# Altium PCB MB1293C.PcbDoc
Units mm, origin at the board's own origin, x right, y up, seen from the top; angles counter-clockwise.
Board outline 50.63 x 26.23 mm, 2 copper layers (Top Layer, Bottom Layer), stack 1.571 mm thick; 73 components, 55 nets, 560 pads, 45 vias.
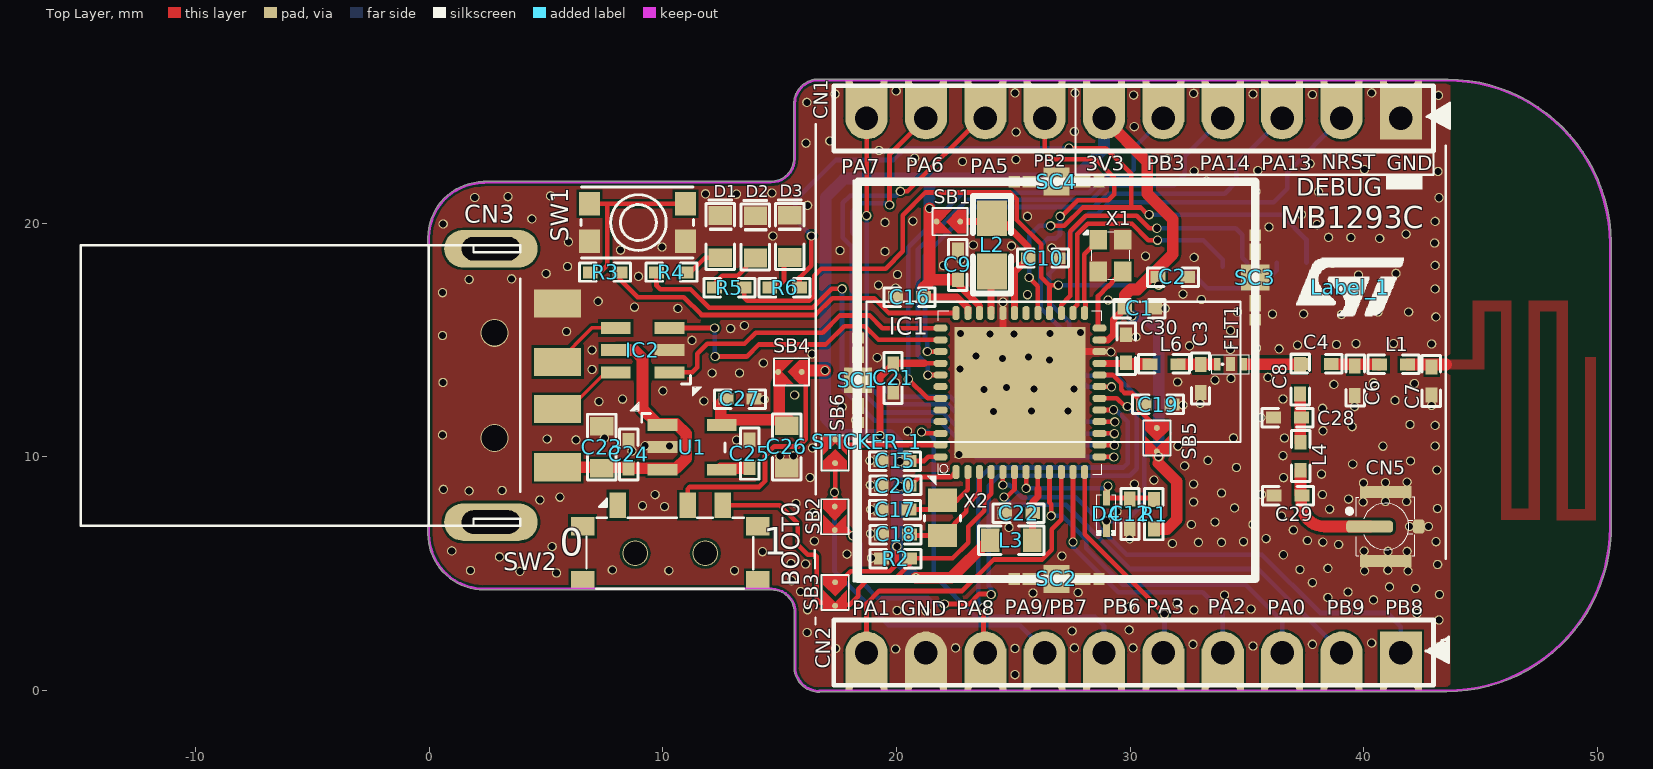
[diagram p0: Top Layer view]
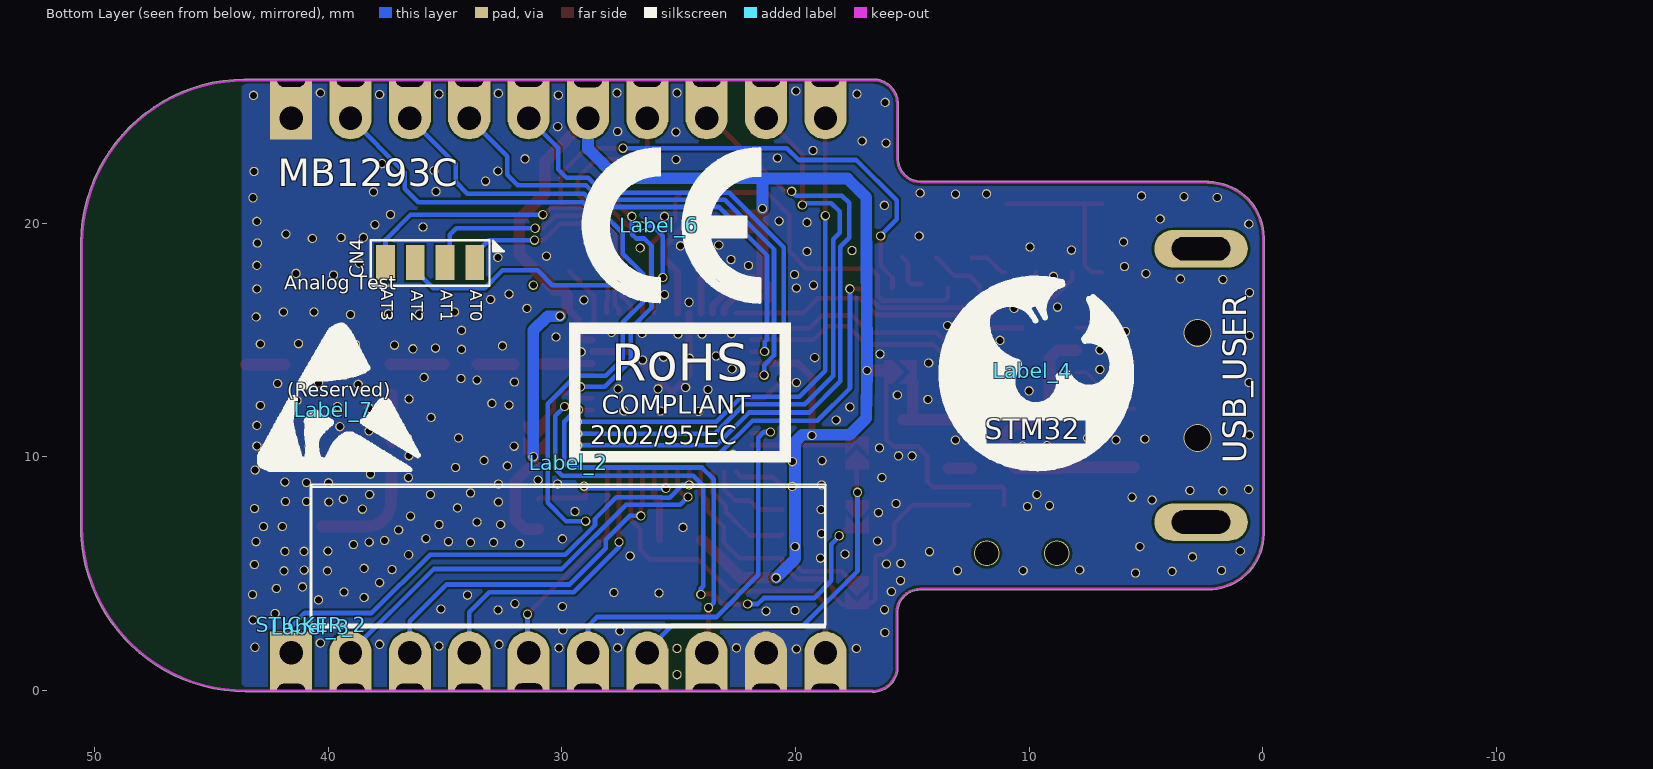
[diagram p1: Bottom Layer view, seen from below]

## Layer stack, top to bottom
Top Solder: solder mask 0.0102, Solder Resist, Dk 4.2
Top Layer: signal copper 0.0356
Dielectric1: prepreg 1.5, FR-4, Dk 4.4
Bottom Layer: signal copper 0.0356
Bottom Solder: solder mask 0.0102, Solder Resist, Dk 4.2

## Board outline
-0.051,6.716 cw(c-0.001,6.716) -0.051,6.724 -0.051,19.377 cw(c2.356,19.377) 2.326,21.783 cw(c2.356,21.743) 2.356,21.793 3.843,21.793 cw(c3.87,21.751) 3.87,21.801 14.63,21.801 cw(c14.63,21.751) 14.632,21.801 ccw(c14.63,22.771) 15.599,22.768 ccw(c14.63,22.771) 15.599,22.769 15.599,22.768 cw(c15.65,22.771) 15.599,22.773 15.599,25.101 cw(c16.67,25.101) 16.66,26.171 cw(c16.67,26.122) 16.67,26.172 43.568,26.172 cw(c43.568,26.122) 43.586,26.169 cw(c43.528,19.118) 50.578,19.194 cw(c50.53,19.178) 50.58,19.178 50.58,6.711 cw(c50.53,6.711) 50.573,6.685 cw(c43.53,7.001) 43.548,-0.05 cw(c43.54,0) 43.54,-0.05 16.72,-0.05 cw(c16.69,-0.01) 16.69,-0.06 cw(c16.69,1.01) 15.619,1.01 cw(c15.67,1.01) 15.625,1.033 15.625,3.341 cw(c15.675,3.341) 15.629,3.362 ccw(c14.66,3.341) 14.66,4.31 cw(c14.66,4.361) 14.63,4.32 2.385,4.32 cw(c2.355,4.361) 2.355,4.31 cw(c2.355,6.716)

## Design rules (kind name [scope] priority, off if disabled: settings)
AssemblyTestPointUsage [All] p1 off:
AssemblyTestpoint [All] p1 off: testpointundercomponent=TRUE minsize=1.016 maxsize=2.54 preferedsize=1.524 minholesize=0 maxholesize=1.016 preferedholesize=0.813 testpointgrid=0.025 usegrid=TRUE gridtolerance=0 allowsidetop=TRUE allowsidebottom=TRUE
Clearance Clearance_PolyTop [InPolygon vs OnLayer('Top Layer')] p1: gap=0.115 ignorepadtopadclearanceinfootprint=FALSE except(0: Arc-Hole Track-Hole SMDPad-Hole THPad-Hole Via-Hole Fill-Hole Poly-Hole Region-Hole Text-Hole)
Clearance Clearance_1 [All] p2: gap=0.1 ignorepadtopadclearanceinfootprint=FALSE except(0: Arc-Hole Track-Hole SMDPad-Hole THPad-Hole Via-Hole Fill-Hole Poly-Hole Region-Hole Text-Hole)
ComponentClearance [All] p1 off: gap=0 collisioncheckmode=3 verticalgap=0.254 showdistances=FALSE
DiffPairsRouting [All] p1: maxlimit=0.254 minlimit=0.254 mostfreqgap=0.254 toplayer_minwidth=0.1 toplayer_maxwidth=0.381 toplayer_prefwidth=0.381 bottomlayer_minwidth=0.1 bottomlayer_maxwidth=0.381 bottomlayer_prefwidth=0.381 maxuncoupledlength=12.7
FabricationTestPointUsage TestPointUsage [All] p1 off: valid=0 allowmultiple=FALSE
FabricationTestpoint Testpoint [All] p1 off: side=3 testpointundercomponent=TRUE minsize=1.016 maxsize=2.54 preferedsize=1.524 minholesize=0.508 maxholesize=1.016 preferedholesize=0.813 testpointgrid=0.025 allowsidetop=TRUE allowsidebottom=TRUE usegrid=TRUE gridtolerance=0
FanoutControl Fanout_BGA [IsBGA] p1 off: bgadir=Out bgaviamode=Centered fanoutstyle=Auto fanoutdirection=Alternating viagrid=0.025 // Fanout_BGA (Default Rule)
FanoutControl Fanout_LCC [IsLCC] p2 off: bgadir=Out bgaviamode=Centered fanoutstyle=Auto fanoutdirection=Alternating viagrid=0.025 // Fanout_LCC (Default Rule)
FanoutControl Fanout_SOIC [IsSOIC] p3 off: bgadir=Out bgaviamode=Centered fanoutstyle=Auto fanoutdirection=Alternating viagrid=0.025 // Fanout_SOIC (Default Rule)
FanoutControl Fanout_Small [(CompPinCount < 5)] p4 off: bgadir=Out bgaviamode=Centered fanoutstyle=Auto fanoutdirection=OutThenIn viagrid=0.025 // Fanout_Small (Default Rule)
FanoutControl Fanout_Default [All] p5 off: bgadir=Out bgaviamode=Centered fanoutstyle=Auto fanoutdirection=Alternating viagrid=0.025 // Fanout_Default (Default Rule)
HoleSize [All] p1: absolutevalues=TRUE maxlimit=3.5 minlimit=0.2 maxpercent=80.000 minpercent=20.000
HoleToHoleClearance [All] p1 off: gap=0.254 allowstackedmicrovias=TRUE
MinimumSolderMaskSliver [All] p1 off: minsoldermaskwidth=0.254
NetAntennae [All] p1 off: netantennaetolerance=0
PasteMaskExpansion [All] p1 off: expansion=0
PolygonConnect [All] p1: connectstyle=Direct reliefconductorwidth=0.254 reliefentries=4 polygonreliefangle="90 Angle" airgapwidth=0.254
RoutingTopology [All] p1 off: topology=Shortest
RoutingVias [All] p1: holewidth=0.4 width=0.6 viastyle="Through Hole" minholewidth=0.2 minwidth=0.3 maxholewidth=6 maxwidth=10
SilkToBoardRegionClearance [All] p1 off:
SilkToSilkClearance [All] p1 off: silktosilkclearance=0.254
SilkToSolderMaskClearance SilkscreenOverComponentPads [IsPad] p1 off: minsilkscreentomaskgap=0.254 clearancetoexposedcopper=TRUE
SolderMaskExpansion [All] p1 off: expansion=0.102
Width [All] p1: maxlimit=5 minlimit=0.1 preferedwidth=0.2 minimp=50.000000 maximp=50.000000 favimp=50.000000
10 further rules are at their usual default settings.

## Classes and differential pairs
component class Schematic: C1 C2 C3 C4 C6 C7 C8 C9 C10 C12 C15 C16 C17 C18 C19 C20 C21 C22 C23 C24 C25 C26 C27 C28 C29 C30 CN1 CN2 CN3 CN4 CN5 D1 D2 D3 D4 FLT1 IC1 IC2 L1 L2 L3 L4 L6 R1 R2 R3 R4 R5 R6 R39 R40 R41 SB1 SB2 SB3 SB4 SB5 SB6 SC1 SC2 SC3 SC4 SW1 SW2 U1 X1 X2
component class Project_Overview: Label_1 Label_2 Label_3 Label_4 Label_5 Label_6 Label_7 Label_9 STICKER_2
differential pair USB: +USB_P -USB_N

## Components (designator, comment, footprint, x,y, rotation, side; value= is the part's Value field where it differs from the comment)
C1 "100nF" 0402_CAP_NPOL#1 30.404,16.358 r180 top
C2 "100pF" 0402_CAP_NPOL#1 31.826,17.704 r180 top
C3 "0.3pF" 0402_CAP_NPOL#2 33.02,13.36 r90 top
C4 "10nF" 0402_CAP_NPOL#1 37.97,13.974 r0 top
C6 "NF" 0402_CAP_NPOL#1 39.61,13.264 r270 top
C7 "1.5pF" 0402_CAP_NPOL#2 42.9,13.254 r90 top
C8 "NF" 0402_CAP_NPOL#1 37.27,13.324 r270 top
C9 "4.7uF" 0402_CAP_NPOL#1 22.631,18.217 r90 top
C10 "4.7uF" 0402_CAP_NPOL#1 26.27,18.501 r0 top
C12 "100nF" 0402_CAP_NPOL#1 29.98,7.561 r270 top
C15 "100nF" 0402_CAP_NPOL#2 19.94,9.831 r180 top
C16 "100nF" 0402_CAP_NPOL#2 20.56,16.841 r180 top
C17 "10pF" 0402_CAP_NPOL#2 19.94,7.751 r180 top
C18 "10pF" 0402_CAP_NPOL#2 19.96,6.691 r180 top
C19 "100nF" 0402_CAP_NPOL#2 31.191,12.243 r0 top
C20 "100nF" 0402_CAP_NPOL#2 19.95,8.771 r0 top
C21 "100nF" 0402_CAP_NPOL#2 19.863,13.386 r90 top
C22 "100nF" 0402_CAP_NPOL#2 25.23,7.601 r180 top
C23 "1uF" 0603_CAP_NPOL 7.391,10.419 r270 top
C24 "100nF" 0402_CAP_NPOL#2 8.534,10.114 r270 top
C25 "10nF" 0402_CAP_NPOL#2 13.716,10.14 r270 top
C26 "1uF" 0603_CAP_NPOL 15.3,10.431 r90 top
C27 "100nF" 0402_CAP_NPOL#2 13.3,12.491 r180 top
C28 "NF" 0402_CAP_NPOL#2 36.728,11.684 r180 top
C29 "NF" 0402_CAP_NPOL#2 36.754,8.357 r180 top
C30 "0.8pF" 0402_CAP_NPOL#2 29.82,14.63 r270 top
CN1 "HEADER_1X10" "Header M/F 1x10x2.54 NF" 41.58,24.491 r180 top
CN2 "HEADER_1X10" "Header M/F 1x10x2.54 NF" 41.58,1.631 r180 top
CN3 "USB_1" USB/A_M1 3.9,13.061 r90 top
CN4 "HEADER_1X4" SIL4_127_B 33.731,18.313 r270 bottom
CN5 "UFL" UFL 40.93,7.024 r90 top (schematic designator J2)
D1 "LED BLUE" 0603_LED_Blue 12.466,19.43 r270 top
D2 "LED GREEN" 0603_LED_GREEN 13.966,19.42 r270 top
D3 "LED RED" 0603_LED_RED 15.426,19.44 r270 top
D4 "BAT54K" SOD523 28.98,7.571 r270 top
FLT1 "LFB182G45CGFD436" LFB182G45CGFD436 34.29,13.97 r0 top
IC1 "STM32WBxx_QFN48" STM32WBxx_QFN48 25.29,12.761 r90 top
IC2 "USBLC6-2" SOT23-6 10.29,13.621 r180 top
L1 "3.6nH" 0402_COIL 41.27,13.954 r0 top
L2 "10uH" 0805_COIL 24.09,20.221 r270 top
L3 "FCM1608KF-601T03" 0603_COIL 24.91,6.441 r0 top
L4 "0R" 0402_COIL 37.28,10.034 r270 top
L6 "2.7nH" 0402_COIL 31.445,13.97 r0 top
Label_1 "LOGO_ST" LOGO_ST_Size2 39.421,17.272 r0 top
Label_2 "LOGO_ROHS" SYMBOL_RoHS 29.693,9.754 r180 bottom
Label_3 "LOGO_StickerArea_Prod_Reservation" LOGO_Sticker_Area 40.742,2.718 r180 bottom
Label_4 "LOGO_STM32" LOGO_STM32 9.855,13.691 r180 bottom
Label_6 "LOGO_CE" "LOGO CE" 25.832,19.914 r180 bottom
Label_7 "LOGO_ESD" "LOGO ESD" 39.751,12.014 r180 bottom
R1 "100K" 0402_RES#1 31.02,7.551 r90 top
R2 "10K" 0402_RES#2 19.96,5.651 r180 top
R3 "1K" 0402_RES#1 7.53,17.901 r0 top
R4 "680" 0402_RES#1 10.37,17.901 r0 top
R5 "680" 0402_RES#1 12.852,17.247 r180 top
R6 "680" 0402_RES#1 15.215,17.247 r180 top
SB1 "Open" SB-tiny 22.225,20.071 r180 top
SB2 "Close" SB-tiny 17.36,7.378 r270 top
SB3 "Open" SB-tiny 17.374,4.14 r270 top
SB4 "Close" SB-tiny 15.443,13.64 r180 top
SB5 "Open" SB-tiny 31.14,10.744 r270 top
SB6 "Open" SB-tiny 17.374,10.236 r90 top
SC1 "Shield Clip_A 3.9x1.1x1.28" "Shield Clip_A 3.9x1.1x1.28" 18.35,13.28 r90 top locked
SC2 "Shield Clip_A 3.9x1.1x1.28" "Shield Clip_A 3.9x1.1x1.28" 26.85,4.78 r180 top
SC3 "Shield Clip_A 3.9x1.1x1.28" "Shield Clip_A 3.9x1.1x1.28" 35.35,17.678 r90 top
SC4 "Shield Clip_A 3.9x1.1x1.28" "Shield Clip_A 3.9x1.1x1.28" 26.85,21.78 r180 top locked
SH1 "Shield 17.2x17.2x3" "SHIELD 17.2X17.2X3" 0.356,-23.927 r0 top
STICKER_1 "FCC_ID_Sticker_16x6" "Sticker_FCC_ID 16x6mm" 18.72,10.643 r0 top
STICKER_2 "Sticker_Prod_22x6" Sticker_Prod_22x6mm 40.716,2.819 r180 bottom
SW1 "User PB" "SW-PB SMD KMR2" 8.92,20.031 r180 top
SW2 "MLL1200S_TE" MLL1200S_TE 10.32,5.881 r0 top
U1 "LD3985M33R" SOT23-5 11.26,10.408 r0 top
X1 "NX2016_32MHz" NX2016_4P 29.159,18.618 r270 top
X2 "NX2012_32K768Hz" NX2012_2P 21.97,8.141 r270 top

## Footprints (in the part's own frame and the unit in brackets; to place one, negate y for a bottom-side part, rotate by r counter-clockwise, add the part's x,y. Pads: shape width x height; smd on the part's side, far side on the other; paste and mask are expansions set on the pad)
0402_CAP_NPOL#1 [mil] "Capacitor FootPrint 0402"
  rect 25x20 smd: 1(-25,0) 2(25,0)
  silkscreen extent -43,-15 43,16, body extent -39,-14 41,14, height 32
0402_CAP_NPOL#2 [mil] "Capacitor FootPrint 0402"
  rect 25x20 smd: 1(-23.58,0) 2(23.58,0)
  silkscreen extent -43,-15 43,16, body extent -39,-14 41,14, height 32
0402_COIL [mil] "Coil FootPrint 0402"
  rect 25x20 smd: 1(-23.58,0) 2(23.58,0)
  silkscreen extent -43,-15 43,16, body extent -38,-11 39,13, height 16
0402_RES#1 [mil] "Resistor FootPrint 0402"
  rect 25x20 smd: 1(-25,0) 2(25,0)
  silkscreen extent -43,-15 43,16, body extent -38,-11 39,13, height 16
0402_RES#2 [mil] "Resistor FootPrint 0402"
  rect 25x20 smd: 1(-23.58,0) 2(23.58,0)
  silkscreen extent -43,-15 43,16, body extent -38,-11 39,13, height 16
0603_CAP_NPOL [mm] "Capacitor FootPrint 0603"
  rect 0.8x1 smd: 1(-0.902,0) 2(0.902,0)
  silkscreen extent -1.41,-0.61 1.41,0.61, body extent -1.28,-0.46 1.26,0.48, height 0.82
0603_COIL [mm] "Coil Footprint 0603"
  rect 0.8x1 smd: 1(-0.902,0) 2(0.902,0)
  silkscreen extent -1.41,-0.61 1.41,0.61, body extent -1.26,-0.48 1.26,0.48, height 0.4
0603_LED_Blue [mm] "Resistor Footprint 0603"
  rect 0.8x1 smd: A(0.902,0) K(-0.902,0)
  silkscreen extent -1.59,-0.61 1.41,0.61, body extent -1.26,-0.48 1.26,0.48, height 0.84
0603_LED_GREEN [mm] "Resistor Footprint 0603"
  rect 0.8x1 smd: A(0.902,0) K(-0.902,0)
  silkscreen extent -1.59,-0.61 1.41,0.61, body extent -1.26,-0.48 1.26,0.48, height 0.84
0603_LED_RED [mm] "Resistor Footprint 0603"
  rect 0.8x1 smd: A(0.902,0) K(-0.902,0)
  silkscreen extent -1.59,-0.61 1.41,0.61, body extent -1.26,-0.48 1.26,0.48, height 0.84
0805_COIL [mil] "Coil FootPrint 0805"
  rect 60x50 smd: 1(0,0) 2(90,0)
  silkscreen extent -37,-32 127,32, body extent -21,-25 113,25, height 16
"Header M/F 1x10x2.54 NF" [mm] "1x10x2.54 Header Not Fitted"
  rect 1.8x1.8 hole 1: 1(0,0)
  round 1.8 hole 1: 2(2.54,0) 3(5.08,0) 4(7.62,0) 5(10.16,0) 6(12.7,0) 7(15.24,0) 8(17.78,0) 9(20.32,0) 10(22.86,0)
  silkscreen extent -1.4,-1.4 24.26,1.4
LFB182G45CGFD436 [mm] "Band Pass Filter Murata LFB182G45CGFD436"
  rect 0.28x0.55 smd mask-0.01: 1(-0.56,0) 3(0.56,0)
  rect 0.4x0.6 smd mask-0.01: 2(0,0)
  silkscreen extent -0.8,-0.4 0.8,0.4, body extent -0.79,-0.39 0.8,0.39, height 0.66
"LOGO CE" [mm]
  silkscreen extent -3.27,-3.31 4.33,3.3
"LOGO ESD" [mm]
  silkscreen extent -3.23,-2.59 3.66,3.68
LOGO_ST_Size2 [mm]
  silkscreen extent -2.31,-1.22 2.29,1.24
LOGO_Sticker_Area [mm] "Sticker Area reservation 22x6 mm"
  silkscreen extent 0,0 22,6
LOGO_STM32 [mm]
  silkscreen extent -3.9,-4.23 4.33,3.95
MLL1200S_TE [mm] "1RT switch"
  rect 1x0.8 smd mask-0.01: 0(-3.75,-1.15) 0(-3.75,1.15) 0(3.75,-1.15) 0(3.75,1.15)
  round 1.1 hole 1 mask-0.01: 0(-1.5,0) 0(1.5,0)
  rect 0.7x1.1 smd mask-0.01: 1(-2.25,2.05) 2(0.75,2.05) 3(2.25,2.05)
  silkscreen extent -3.58,-1.52 3.56,2.34, body extent -3.85,-2.85 3.85,2.24, height 1.4
NX2012_2P [mm]
  rect 1x1.25 smd: 1(0,0) 2(1.5,0)
  silkscreen extent 0.63,-0.76 0.89,0.76, body extent -0.33,-0.76 1.88,0.76, height 0.75
NX2016_4P [mm]
  rect 0.85x0.75 smd mask-0.01: 1(-0.675,-0.525) 2(0.675,-0.525) 3(0.675,0.525) 4(-0.675,0.525)
  silkscreen extent -1.07,-1.16 1.02,0.81, body extent -1,-0.8 1,0.8, height 0.7
SB-tiny [mil]
  round 10 smd paste-10 mask+0.04: 1(-19.69,0)
  round 10 smd paste-10.08 mask+0.04: 2(20,0)
  Top Layer region: -5.91,19.69 13.78,0 -5.91,-19.68 25,-19.68 25,19.69
  Top Layer region: -30,-19.68 -30,19.69 -15.75,19.69 3.94,0 -15.75,-19.68
  silkscreen extent -32,-23 27,23
"SHIELD 17.2X17.2X3" [mm] "Metallic Shield 17.2x17.2mm height =3mm tickness=0.2mm"
  silkscreen extent 17.81,28.6 35.08,45.75, body extent 17.84,28.6 35.04,45.8, height 3
"Shield Clip_A 3.9x1.1x1.28" [mm] "Shield Clip 3.9x1.1x1.28 - Harwin S0951-46R - Full pad"
  rect 0.48x0.5 smd mask+0.075: 1(-1.81,0) 1(1.81,0)
  rect 0.7x0.5 smd mask+0.075: 1(-1.1,0) 1(1.1,0)
  rect 1.1x1.2 smd mask+0.075: 1(0,0)
  body extent -1.95,-0.55 1.95,0.55, height 1.28
SIL4_127_B [mm]
  rect 1.5x0.8 smd: 1(0,0) 2(0,-1.27) 3(0,-2.54) 4(0,-3.81)
  silkscreen extent -0.97,-4.44 0.99,1.24
SOD523 [mm]
  rect 0.65x0.3 smd mask+0.05: A(-0.675,0) K(0.675,0)
  silkscreen extent -0.81,-0.41 0.91,0.41, body extent -0.81,-0.41 0.81,0.41, height 0.62
SOT23-5 [mil]
  rect 50x20 smd: 1(-50,37.5) 2(-50,0.5) 3(-50,-37.5) 4(50,-37.5) 5(50,37.5)
  silkscreen extent -104,-8 55,77, body extent -55,-57 55,57, height 57
SOT23-6 [mm]
  rect 1.27x0.508 smd: 1(0,0) 2(0,-0.95) 3(0,-1.9) 4(2.3,-1.9) 5(2.3,-0.95) 6(2.3,0)
  silkscreen extent -1.37,0.13 -0.51,1, body extent -0.02,-2.39 2.32,0.53, height 1
"Sticker_FCC_ID 16x6mm" [mm] "Sticker_FCC_ID 16x6mm White"
  silkscreen extent 0,0 16,6, body extent 0,0 16,5.97, height 3.1
Sticker_Prod_22x6mm [mm] "Sticker_Prod_22x6mm White"
  silkscreen extent 0,0 22,6, body extent 0,0 22,5.97, height 0.1
STM32WBxx_QFN48 [mm] "QFN48 7x7x0.55mm pitch 0.5mm"
  oct 0.6x0.3 smd mask+0.06: 1(-3.398,2.746) 2(-3.398,2.239) 3(-3.398,1.739) 4(-3.398,1.239) 5(-3.398,0.739) 6(-3.398,0.239) 7(-3.398,-0.261) 8(-3.398,-0.761) 9(-3.398,-1.261) 10(-3.398,-1.761) 11(-3.398,-2.261) 12(-3.398,-2.761) 25(3.398,-2.761) 26(3.398,-2.261) 27(3.398,-1.761) 28(3.398,-1.261) 29(3.398,-0.761) 30(3.398,-0.261) 31(3.398,0.239) 32(3.398,0.739) 33(3.398,1.239) 34(3.398,1.739) 35(3.398,2.239) 36(3.398,2.739)
  oct 0.3x0.6 smd mask+0.06: 13(-2.752,-3.399) 14(-2.252,-3.399) 15(-1.752,-3.399) 16(-1.252,-3.399) 17(-0.752,-3.399) 18(-0.252,-3.399) 19(0.248,-3.399) 20(0.748,-3.399) 21(1.248,-3.399) 22(1.748,-3.399) 23(2.248,-3.399) 24(2.748,-3.399) 37(2.748,3.399) 38(2.248,3.399) 39(1.748,3.399) 40(1.248,3.399) 41(0.748,3.399) 42(0.248,3.399) 43(-0.252,3.399) 44(-0.752,3.399) 45(-1.252,3.399) 46(-1.752,3.399) 47(-2.252,3.399) 48(-2.752,3.399)
  rect 5.6x5.6 smd paste-3 mask+0.08: 49(0,0)
  silkscreen extent -3.95,-3.5 3.5,3.96, body extent -3.51,-3.51 3.51,3.51, height 0.78
"SW-PB SMD KMR2" [mm]
  rect 0.9x1 smd: 1(-2.05,0.8) 1(2.05,0.8) 2(-2.05,-0.8) 2(2.05,-0.8)
  silkscreen extent -2.4,-1.52 2.42,1.53, body extent -2.41,-1.52 2.41,1.52, height 2.52
SYMBOL_RoHS [mm]
  silkscreen extent 0,0 9.5,6
UFL [mm] "UFL RF connector SMD"
  rrect50% 0.5x2 smd: 1(0,0.686)
  rect 0.5x2.2 smd: 2(-1.475,0) 2(1.475,0)
  rrect50% 0.6x0.5 smd: 2(0,-1.422)
  silkscreen extent -1.25,-1.25 1.27,1.6, body extent -1.7,-1.55 1.7,1.55, height 1.25
USB/A_M1 [mm]
  round 1.2 hole 1.1: 0(-2.25,1.1) 0(2.25,1.1)
  rect 1.2x2 smd: 1(-3.5,-1.6) 2(-1,-1.6) 3(1,-1.6) 4(3.5,-1.6)
  oval 1.6x4 hole 1 slot 2.5 at 90 deg: 5(-5.85,1.25) 5(5.85,1.25)
  silkscreen extent -6,0 6,18.8, body extent -6.31,-1.5 6.3,18.8, height 3.2

## Part data
C1 C2 C3 C4 C6 C7 C8 C9 C10 C12 C15 C16 C17 C18 C19 C20 C21 C22 C23 C24 C25 C26 C27 C28 C29 C30: library part CAP_NPOL, "Capacitor_not polarized"
D1 D2 D3: library part LED, "Light-Emitting Diode"
D4: "Schottky Diode"
FLT1: "Band Pass Filter Murata LFB182G45CGFD436"
L1 L4 L6: library part INDUCTOR_SMD_STDL
L2: library part IND_74479777310A, "Coil Wurtz 10uH ref: 74479777310A"
L3: library part IND_FCM1608KF-601T03
Label_3: "Area Resevation for Prod Sticker 22x6mm"
R1 R2 R3 R4 R5 R6: library part RES, "Resistor"
SB1 SB2 SB3 SB4 SB5 SB6: library part Strap2, "Solder Jumper"
SC1 SC2 SC3 SC4: "Harwin S0951-46R"
SH1: library part Shield, "Shield"
STICKER_1: library part LOGO_Sticker_FCC_ID, "Sticker for FCC_ID 16x6mm"
STICKER_2: library part LOGO_Sticker_Prod, "Prod Sticker 22x6mm"
SW1: library part SW-PB_1, "Push-button SMD"
U1: "3.3V low drop voltage regulator"
X1: library part NX2016_32M, "Crystal NDK 2.0x1.6mm  32 MHz"
X2: library part NX2012_32K768, "Crystal NDK 2.0x1.2mm  32.768 KHz"

## Free pads (board coordinates)
  rect 1.8x1.8 hole 0.6 slot 1.2 at 0 deg copper offset 0,0.9 mask-0.01: 2(18.72,-0.005) 2(21.26,-0.005) 2(23.8,-0.005) 2(26.34,-0.005) 2(28.88,-0.005) 2(31.42,0.01) 2(33.96,-0.005) 2(36.5,-0.005) 2(39.04,-0.005) 2(41.58,-0.005)
  rect 1.8x1.8 hole 0.6 slot 1.2 at 0 deg copper offset 0,-0.9 mask-0.01: 2(18.72,26.136) 2(21.26,26.136) 2(23.8,26.136) 2(26.34,26.136) 2(28.88,26.121) 2(31.42,26.136) 2(33.96,26.136) 2(36.5,26.136) 2(39.04,26.136) 2(41.58,26.136)
  round 0.4 hole 0.3 mask-0.01: 24(29.98,6.501) 25(7.5,10.811) 26(10.29,10.461) 27(8.68,10.251) 28(13.16,10.721) 29(15.01,10.051) 30(15.59,10.051) 31(9.25,10.481) 32(14.34,12.461) 33(19.507,20.041) 34(27.61,23.927) 35(29.17,14.501) 36(18.93,5.671) 37(18.89,6.721) 38(18.9,7.751) 39(18.88,8.801) 40(18.86,9.841) 41(20.14,9.801) 42(20.14,8.741) 43(24.56,16.621) 44(42.9,12.204) 45(39.6,12.154) 46(35.59,11.694) 47(35.62,8.394) 48(39.98,8.894) 49(40.92,8.904) 50(41.85,8.924) 51(39.97,8.074) 52(40.92,8.094) 53(41.83,8.094) 54(42.76,7.024) 55(41.96,7.024) 56(41.85,5.964) 57(41.03,5.964) 58(40.01,5.974) 59(40.03,5.131) 60(41.021,5.156) 61(41.885,5.131) 71(32.995,12.294) 74(19.964,17.226) 76(22.758,18.445) 77(19.177,14.249) 78(29.958,2.603) 79(22.743,15.278) 80(22.708,13.772) 81(23.749,12.883) 82(26.561,15.288) 83(27.587,12.918) 84(27.865,15.336) 85(22.669,10.112) 86(25.026,15.259) 87(23.999,15.259) 88(24.7,12.976) 89(25.88,12.918) 90(26.542,14.146) 91(23.395,14.319) 92(24.537,14.223) 93(25.649,14.271) 94(24.143,11.949) 95(25.774,11.969) 96(27.347,11.969) 97(27.076,5.766) 99(27.52,2.552) 100(25.843,4.178) 101(27.774,4.203) 102(32.01,3.721) 103(16.18,2.489) 104(16.114,5.418) 105(16.191,3.464) 106(32.726,3.454) 107(35.175,3.491) 108(36.551,5.817) 109(40.411,3.886) 110(37.795,4.623) 111(34.468,7.823) 112(42.215,4.374) 113(38.456,3.988) 114(42.266,3.302) 115(32.715,8.077) 116(33.909,6.35) 117(35.82,6.504) 118(37.58,6.424) 119(38.92,6.254) 120(32.334,9.623) 121(32.715,8.839) 122(17.583,18.834) 123(13.487,15.621) 124(17.677,12.137) 125(18.258,11.578) 126(14.707,19.456) 127(14.3,14.021) 128(12.116,13.589) 129(12.903,15.494) 130(20.041,17.805) 131(22.821,22.644) 132(19.228,17.348) 133(37.7,22.549) 134(35.381,21.363) 135(35.458,22.255) 136(33.261,21.799) 137(32.741,22.23) 138(31.572,22.758) 139(25.121,23.901) 142(25.108,22.724) 143(30.174,24.133) 144(25.603,20.295) 145(22.012,18.189) 146(23.285,19.07) 147(24.924,19.035) 148(19.507,18.796) 149(20.701,20.091) 150(33.045,16.739) 151(32.537,14.757) 152(35.408,14.656) 153(37.16,14.783) 154(38.827,14.813) 155(39.663,14.848) 156(41.264,14.848) 157(42.901,14.836) 158(43.075,15.997) 159(43.052,17.192) 160(43.052,18.202) 161(43.029,19.153) 162(43.052,20.082) 163(43.052,11.354) 164(43.052,10.472) 165(43.122,9.439) 166(43.145,7.791) 167(43.087,6.375) 168(43.156,5.4) 169(43.133,1.859) 170(43.191,25.473) 171(43.168,22.218) 172(43.214,21.092) 173(37.33,20.372) 174(38.061,21.347) 175(7.264,12.37) 175(8.28,12.471) 175(16.383,14.402) 175(16.408,10.389) 175(40.023,22.299) 176(38.49,19.397) 177(35.941,19.837) 178(34.29,15.418) 179(19.253,23.114) 180(37.998,19.939) 181(38.659,18.288) 182(30.251,15.138) 183(34.59,16.205) 184(36.088,16.113) 185(37.422,16.125) 186(33.63,13.284) 187(32.029,13.208) 188(34.315,13.36) 189(38.711,13.107) 190(38.235,12.085) 191(41.334,12.422) 192(40.406,13.176) 193(42.158,13.142) 194(38.247,11.122) 195(38.189,9.265) 196(38.223,8.394) 197(36.598,10.808) 198(36.564,9.114) 199(36.54,12.48) 200(35.89,13.409) 201(36.373,14.63) 202(32.037,10.46) 203(36.471,7.466) 204(36.98,6.874) 205(38.24,6.354) 206(38.537,7.767) 207(39.349,8.197) 208(36.54,10.054) 209(32.258,12.217) 210(34.416,10.819) 211(33.325,9.856) 212(34.544,9.55) 213(32.614,7.112) 214(35.252,7.11) 215(39.5,11.296) 216(41.973,11.389) 217(41.996,9.833) 218(39.523,9.694) 219(40.812,10.46) 220(39.44,19.389) 221(41.807,19.535) 222(39.039,16.093) 223(40.605,16.202) 224(41.917,16.202) 225(40.678,19.352) 226(39.767,17.786) 227(41.37,17.859) 228(0.971,5.983) 229(1.772,5.145) 230(3.885,5.109) 231(5.452,5.036) 232(5.27,6.165) 233(3.011,5.728) 234(0.607,19.972) 235(1.955,21.101) 236(3.375,21.137) 237(5.197,21.174) 238(4.395,20.19) 239(5.962,19.207) 240(5.925,18.15) 241(7.239,16.662) 242(8.788,16.408) 243(5.597,8.278) 244(9.677,8.387) 245(9.131,7.914) 246(10.078,7.877) 247(14.267,5.947) 248(15.494,5.441) 249(15.697,8.006) 250(15.506,4.708) 251(13.284,13.589) 252(11.754,12.395) 253(10.005,12.832) 254(15.646,12.649) 255(16.307,9.119) 256(16.453,7.617) 257(20.023,3.433) 258(20.777,22.789) 259(16.125,23.427) 260(16.162,25.176) 261(16.198,20.768) 262(9.969,18.988) 263(8.195,18.85) 264(8.966,17.729) 265(10.643,16.358) 266(11.249,14.991) 267(13.153,21.245) 268(14.665,21.296) 269(11.827,21.262) 270(0.577,17.03) 271(0.577,15.195) 272(0.594,13.19) 273(0.577,10.947) 274(0.611,8.618) 275(4.74,8.16) 276(5.012,17.846) 277(3.534,17.625) 278(1.716,17.591) 279(1.716,8.55) 280(3.126,8.567) 281(31.801,6.299) 282(31.013,9.009) 283(15.9,4.242) 284(5.885,15.368) 285(6.978,14.574) 286(6.978,13.746) 287(6.283,10.732) 288(5.057,10.765) 289(7.839,5.169) 290(10.257,5.135) 291(13.072,5.135) 292(21.26,3.404) 293(29.98,3.601) 294(32.918,6.35) 295(20.472,11.105) 296(17.374,25.532) 297(17.399,1.808) 298(19.964,1.783) 299(22.53,1.834) 300(25.07,1.808) 301(27.61,1.834) 302(30.124,1.834) 303(32.69,1.986) 304(35.255,1.91) 305(37.795,1.986) 306(40.335,2.037) 307(43.205,3.023) 308(19.99,25.659) 309(25.07,25.583) 310(27.635,25.583) 311(30.15,25.481) 312(32.715,25.557) 313(35.255,25.532) 314(37.795,25.507) 315(40.335,25.583) 317(41.097,4.445) 318(38.456,5.237) 319(43.231,4.115) 320(34.036,4.089) 321(39.319,4.221) 323(33.909,8.458) 324(33.63,7.214) 325(34.849,6.375) 326(37.262,5.182) 327(24.816,6.99) 328(16.485,6.401) 329(17.882,5.842) 330(17.145,23.52) 582(19.304,10.922) 583(19.964,13.183) 585(30.658,18.593) 586(32.741,18.542) 587(30.175,8.839) 588(29.439,7.671) 589(25.07,0.686) 590(25.603,16.942)
  round 0.4 hole 0.3: 62(34.29,14.605) 63(32.258,16.967) 64(31.496,16.358) 65(30.074,16.027) 69(26.645,18.948) 70(29.058,16.713)

## Via types
v1: diameter 0.4, hole 0.3, Top Layer to Bottom Layer, tented both sides, 45 vias

## Nets (pads, with @x,y where several pads share a name; then routed paths per layer and width w, separated by ;. In a path a pad name is that pad's centre, name@x,y a point inside that pad or via, vN(x,y) a via of type N, cw(c..) or ccw(c..) an arc to the next point about the centre after c; other vN are vias at no path point)
3V3: C1.2 C2.2 C9.1 C15.1 C16.1 C20.2 C21.2 CN1.6 IC1.1 IC1.23 IC1.34 IC1.35 IC1.40 IC1.48 L3.1 pad.2@28.88,26.121 pad.41 pad.42 pad.65 pad.582 R1.1 SB1.2 SB3.1 SB4.1 SB5.2 SW2.2 | length 95.1
  Top Layer w0.2: SW2.2 11.07,8.63 11.157,8.717 14.122,8.717 14.376,8.971 14.376,10.058 14.769,10.451 15.81,10.451 16.12,10.76 16.12,13.681 ; 17.729,4.801 18.039,5.11 19.71,5.11 20.015,5.415 v1(20.015,6.172) v1@20.015,6.177 ; C15.1@20.489,9.831 21.18,9.831 21.358,10.009 IC1.48 ; C20.2@20.499,8.691 20.949,9.141 22.322,9.141 IC1.1 ; 21.207,14.009 IC1.40
  Top Layer w0.3: pad.582 19.304,13.426 C21.2 19.889,14.011 21.207,14.011 ; C16.1 22.598,16.841 23.051,16.388 IC1.35 ; 21.412,17.506 21.488,17.582 ; C9.1 22.439,17.582 23.551,16.47 IC1.34 ; IC1.23 29.055,15.009 29.286,15.24 29.286,15.875 C1.2
  Top Layer w0.5: SB4.1@15.934,13.701 v1(16.942,13.701) ; v1(20.828,4.826) 22.345,4.826 23.96,6.441 L3.1 ; C16.1 21.159,17.252 21.412,17.506 v1(21.412,20.63) 21.412,20.096 21.463,20.046 21.59,20.046 ; 21.488,17.582 C9.1@22.439,17.582 ; CN1.6 30.734,22.636 30.734,21.26 31.826,20.168 31.826,18.669 30.325,17.168 30.021,17.168 29.769,16.916 C1.2 ; R1.1 31.025,6.911 31.574,6.911 31.99,7.326 31.99,8.951 31.21,9.731 ; v1@31.21,10.013 v1@31.21,10.109
  Bottom Layer w0.5: v1(20.015,6.172) 20.015,5.639 v1(20.828,4.826) ; v1@20.02,6.191 20.02,10.651 19.718,10.952 17.673,10.952 16.967,11.659 v1(16.942,13.701) 16.967,21.105 17.779,21.916 21.412,21.916 ; v1(21.412,20.63) 21.412,21.92 27.619,21.92 28.88,23.181 CN1.6@28.88,24.451 ; pad.65 30.607,16.027 31.217,15.418 v1(31.217,10.013)
  other v1: 31.217,17.348
5V_USB: C23.2 C24.2 CN3.1 IC2.5 U1.1 U1.3 | length 12.4
  Top Layer w0.5: CN3.1 C24.2@8.641,9.561 ; IC2.5 8.79,14.571 9.13,14.231 9.13,12.071 9.79,11.411 10.58,11.411 10.998,10.992 10.998,9.936 10.582,9.521 C24.2@8.681,9.521 ; C24.2@8.68,9.522 C24.2@8.681,9.521
ANT: C7.2 L1.2 | length 1.7
  Top Layer w0.4: 43.519,13.954 43.536,13.97
  Top Layer w0.5: L1.2 43.519,13.954
BOOT0: IC1.4 R2.1 SB3.2 SW2.3 | length 18
  Top Layer w0.2: SW2.3 15,7.931 15.77,7.161 15.77,6.248 16.201,5.818 16.509,5.818 16.586,5.74 16.586,3.912 16.739,3.759 17.018,3.759 ; 17.729,3.683 18.009,3.683 18.364,4.039 18.364,4.343 18.801,4.78 19.939,4.78 20.565,5.407 20.565,5.661 22.398,5.661 23.075,6.338 23.075,7.023 23.76,7.708 23.76,8.131 24.051,8.421 IC1.4
GND: C1.1 C2.1 C3.1 C6.2 C7.1 C9.2 C10.2 C12.2 C15.2 C16.2 C17.2 C18.2 C19.2 C20.1 C21.1 C22.2 C23.1 C24.1 C25.1 C26.1 C27.1 C28.2 C29.2 C30.1 CN1.1 CN2.9 CN3.0 CN3.4 CN5.2 D1.K D2.K D3.K FLT1.2 IC1.22 IC1.32 IC1.49 IC2.2 pad.2@21.26,-0.005 pad.2@41.58,26.136 pad.24 pad.25 pad.26 pad.27 pad.28 pad.29 pad.30 pad.31 pad.32 pad.33 pad.34 pad.35 pad.36 pad.37 pad.38 pad.39 pad.40 pad.43 pad.44 pad.45 pad.46 pad.47 pad.48 pad.49 pad.50 pad.51 pad.52 pad.53 pad.54 pad.55 pad.56 pad.57 pad.58 pad.59 pad.60 pad.61 pad.62 pad.63 pad.64 pad.69 pad.70 pad.71 pad.74 pad.76 pad.77 pad.78 pad.79 pad.80 pad.81 pad.82 pad.83 pad.84 pad.85 pad.86 pad.87 pad.88 pad.89 pad.90 pad.91 pad.92 pad.93 pad.94 pad.95 pad.96 pad.97 pad.99 pad.100 pad.101 pad.102 pad.103 pad.104 pad.105 pad.106 pad.107 pad.108 pad.109 pad.110 pad.111 pad.112 pad.113 pad.114 pad.115 pad.116 pad.117 pad.118 pad.119 pad.120 pad.121 pad.122 pad.123 pad.124 pad.125 pad.126 pad.127 pad.128 pad.129 pad.130 pad.131 pad.132 pad.133 pad.134 pad.135 pad.136 pad.137 pad.138 pad.139 pad.142 pad.143 pad.144 pad.145 pad.146 pad.147 pad.148 pad.149 pad.150 pad.151 pad.152 pad.153 pad.154 pad.155 pad.156 pad.157 pad.158 pad.159 pad.160 pad.161 pad.162 pad.163 pad.164 pad.165 pad.166 pad.167 pad.168 pad.169 pad.170 pad.171 pad.172 pad.173 pad.174 pad.175 pad.176 pad.177 pad.178 pad.179 pad.180 pad.181 pad.182 pad.183 pad.184 pad.185 pad.186 pad.187 pad.188 pad.189 pad.190 pad.191 pad.192 pad.193 pad.194 pad.195 pad.196 pad.197 pad.198 pad.199 pad.200 pad.201 pad.202 pad.203 pad.204 pad.205 pad.206 pad.207 pad.208 pad.209 pad.210 pad.211 pad.212 pad.213 pad.214 pad.215 pad.216 pad.217 pad.218 pad.219 pad.220 pad.221 pad.222 pad.223 pad.224 pad.225 pad.226 pad.227 pad.228 pad.229 pad.230 pad.231 pad.232 pad.233 pad.234 pad.235 pad.236 pad.237 pad.238 pad.239 pad.240 pad.241 pad.242 pad.243 pad.244 pad.245 pad.246 pad.247 pad.248 pad.249 pad.250 pad.251 pad.252 pad.253 pad.254 pad.255 pad.256 pad.257 pad.258 pad.259 pad.260 pad.261 pad.262 pad.263 pad.264 pad.265 pad.266 pad.267 pad.268 pad.269 pad.270 pad.271 pad.272 pad.273 pad.274 pad.275 pad.276 pad.277 pad.278 pad.279 pad.280 pad.281 pad.282 pad.283 pad.284 pad.285 pad.286 pad.287 pad.288 pad.289 pad.290 pad.291 pad.292 pad.293 pad.294 pad.295 pad.296 pad.297 pad.298 pad.299 pad.300 pad.301 pad.302 pad.303 pad.304 pad.305 pad.306 pad.307 pad.308 pad.309 pad.310 pad.311 pad.312 pad.313 pad.314 pad.315 pad.317 pad.318 pad.319 pad.320 pad.321 pad.323 pad.324 pad.325 pad.326 pad.327 pad.328 pad.329 pad.330 pad.583 pad.585 pad.586 pad.587 pad.588 pad.589 pad.590 R2.2 SC1.1 SC2.1 SC3.1 SC4.1 SW1.1 U1.2 X1.2 X1.4 | length 7.8
  Top Layer w0.3: IC1.32 24.551,13.5 IC1.49 27.038,14.509 IC1.22
NetC3_2: C3.2 FLT1.1 L6.2 | length 1.5
  Top Layer w0.5: L6.2@32.07,13.97 FLT1.1@33.604,13.97
NetC4_1: C4.1 C8.1 FLT1.3 | length 2.3
  Top Layer w0.5: 35.027,13.97 C4.1@37.331,13.97
NetC4_2: C4.2 C6.1 L1.1 | length 2.1
  Top Layer w0.5: C4.2 40.623,13.974 cw(c40.623,13.905) L1.1
NetC8_2: C8.2 C28.1 L4.1 | length 2.1
  Top Layer w0.5: C28.1@37.269,11.684 cw(c37.242,11.657) 37.28,11.657 L4.1 ; C28.1@37.27,11.685 C8.2
NetC10_1: C10.1 IC1.31 L2.1 SB1.1 | length 6.6
  Top Layer w0.3: SB1.1 23.94,20.071 L2.1 24.412,20.221 25.629,19.004 25.635,19.01 C10.1 25.072,17.937 25.051,17.937 IC1.31
NetC12_1: C12.1 D4.A IC1.7 R1.2 | length 6.8
  Top Layer w0.2: v1@25.551,8.661 IC1.7 ; v1(29.05,8.751) 28.98,8.681 D4.A 30.96,8.246 R1.2
  Bottom Layer w0.2: v1(25.55,8.661) 28.96,8.661 v1(29.05,8.751)
NetC17_1: C17.1 IC1.2 X2.1 | length 3.6
  Top Layer w0.2: C17.1@20.549,7.751 21.58,7.751 X2.1 22.59,8.141 23.051,8.601 IC1.2
NetC18_1: C18.1 IC1.3 X2.2 | length 4.8
  Top Layer w0.2: C18.1 20.609,6.641 X2.2 22.99,7.661 22.99,7.921 23.551,8.481 IC1.3
NetC19_1: C19.1 IC1.20 SB5.1 | length 3.5
  Top Layer w0.2: IC1.20 29.257,13.509 29.616,13.15 29.616,12.878 29.756,12.738 30.083,12.738 30.34,12.482 30.34,12.051 30.94,11.451
NetC22_1: C22.1 IC1.8 L3.2 | length 3
  Top Layer w0.2: 26.051,8.661 IC1.8
  Top Layer w0.3: L3.2 25.812,8.062 26.051,8.301 26.051,8.661
NetC25_2: C25.2 U1.4 | length 1
  Top Layer w0.5: U1.4@12.48,9.521 13.459,9.521 C25.2@13.47,9.532
NetC26_2: C26.2 C27.2 SB4.2 U1.5 | length 5.9
  Top Layer w0.5: C27.2 12.48,12.27 12.48,11.421 12.65,11.591 C26.2@14.98,11.591 ; 15.088,13.259 14.98,13.151 C26.2@14.98,11.591 ; C26.2@15.392,11.591 C26.2@14.98,11.591
NetC29_1: C29.1 CN5.1 L4.2 | length 4.9
  Top Layer w0.5: L4.2@37.289,9.426 37.289,8.394 37.32,8.363 37.32,8.024 ccw(c38.32,8.024) 38.32,7.024 CN5.1
NetC30_2: C30.2 IC1.21 L6.1 | length 2.1
  Top Layer w0.3: IC1.21 C30.2@29.87,14.009
  Top Layer w0.5: C30.2@29.87,13.981 L6.1@30.836,13.981
NetCN2_7: CN2.7 pad.2@26.34,-0.005 SB2.1 SB6.1 | length 17.4
  Top Layer w0.2: SB2.1@17.374,7.917 17.374,9.863
  Bottom Layer w0.2: v1(17.348,8.484) 17.348,5.105 19.66,2.794 25.273,2.794 26.34,1.727 CN2.7 26.34,-0.005
NetCN3_2: CN3.2 IC2.6 | length 3.1
  Top Layer w0.15: CN3.2 6,12.061 7.56,13.621 IC2.6
NetCN3_3: CN3.3 IC2.4 | length 3.1
  Top Layer w0.15: CN3.3 6.96,15.521 IC2.4
NetCN4_1: CN4.1 IC1.26 | length 10.8
  Top Layer w0.2: IC1.26 27.551,16.317 27.74,16.506 27.74,19.538 28.186,19.983 30.077,19.983 30.782,19.279 v1(31.166,19.279)
  Bottom Layer w0.2: v1(31.166,19.279) 33.122,19.279 33.96,18.44 CN4.1@33.96,18.141
NetCN4_2: CN4.2 IC1.27 | length 12.9
  Top Layer w0.2: IC1.27 27.051,16.501 27.44,16.891 27.44,19.662 28.098,20.32 30.277,20.32 30.81,19.787 v1(31.14,19.787)
  Bottom Layer w0.2: v1(31.14,19.787) 34.519,19.787 34.794,19.511 34.794,18.521 CN4.2
NetD1_A: D1.A R4.2 | length 1.7
  Top Layer w0.15: R4.2 R4.2@11.18,17.901
  Top Layer w0.2: R4.2@11.18,17.901 11.807,18.528 D1.A
NetD2_A: D2.A R5.2 | length 2.5
  Top Layer w0.2: R5.2@12.116,17.145 12.116,17.323 12.548,17.755 13.203,17.755 D2.A
NetD3_A: D3.A R6.2 | length 1.7
  Top Layer w0.2: R6.2@14.605,17.399 15.037,17.399 15.189,17.551 15.189,18.301 D3.A
NetIC1_24: IC1.24 X1.3 | length 2.9
  Top Layer w0.2: IC1.24 28.626,15.572 28.626,16.885 29.059,17.318 29.092,17.318 29.209,17.435 29.209,17.468 X1.3
NetIC1_25: IC1.25 X1.1 | length 3.5
  Top Layer w0.2: IC1.25 28.09,16.198 28.09,16.628 28.04,16.678 28.04,18.667 X1.1@28.702,19.329
NetIC1_33: IC1.33 L2.2 | length 2.3
  Top Layer w0.3: L2.2@23.72,17.661 24.051,17.661 IC1.33 ; L2.2 L2.2@24.09,18.389
NetR3_1: R3.1 SW1.2 | length 7.6
  Top Layer w0.2: SW1.2@6.87,20.831 7.63,20.831 ; R3.1 7.33,17.901 7.63,18.201 7.63,20.831 ; SW1.2@10.97,20.831 7.63,20.831
NRST: CN1.2 D4.K pad.2@39.04,26.136 | length 32
  Top Layer w0.2: CN1.2 39.04,26.136
  Bottom Layer w0.2: v1(28.98,7.251) 29.82,7.251 30.607,8.038 30.607,12.273 29.41,13.471 28.121,13.471 27.39,14.202 27.39,15.765 26.524,16.631 26.524,17.829 27.39,18.694 27.39,19.571 28.217,20.397 28.591,20.397 29.094,20.901 36.141,20.901 36.72,21.48 36.72,22.171 CN1.2
PA0: CN2.3 IC1.9 pad.2@36.5,-0.005 | length 15.2
  Top Layer w0.2: IC1.9 26.551,8.051 26.62,7.981 v1(26.62,7.481)
  Bottom Layer w0.2: v1(26.62,7.481) 27.089,7.481 28.118,6.452 28.118,6.096 29.667,4.547 34.925,4.547 36.5,2.972 CN2.3
PA1: CN2.10 IC1.10 pad.2@18.72,-0.005 | length 14.7
  Top Layer w0.2: pad.2@18.72,1.422 18.72,3.731 19.256,4.267 22.809,4.267 24.155,5.613 26.238,5.613 26.65,6.025 26.65,6.911 27.051,7.311 IC1.10
PA2: CN2.4 IC1.11 pad.2@33.96,-0.005 | length 12.5
  Top Layer w0.2: v1(27.55,6.361) IC1.11
  Bottom Layer w0.2: v1(27.55,6.361) 27.55,6.156 29.489,4.216 33.096,4.216 33.96,3.353 CN2.4
PA3: CN2.5 IC1.12 pad.2@31.42,0.01 | length 9.2
  Top Layer w0.2: IC1.12 28.051,6.7 29.23,5.521 29.23,5.517 v1(31.471,3.277)
  Bottom Layer w0.2: CN2.5 31.471,1.681 v1(31.471,3.277)
PA4: IC1.13 R4.1 | length 27
  Top Layer w0.2: R4.1 9.735,17.336 9.9,17.17 11.187,17.17 11.979,16.378 16.411,16.378 17.229,17.196 v1(17.678,17.196) ; IC1.13 29.298,10.009 29.3,10.007 v1(29.3,10.001)
  Bottom Layer w0.2: v1(17.678,17.196) 17.67,17.187 17.67,12.942 19.061,11.551 21.84,11.551 23.39,10.001 v1(29.3,10.001) v1@29.31,10.011
PA5: CN1.8 IC1.14 pad.2@23.8,26.136 | length 29.8
  Top Layer w0.2: v1(20.168,21.366) 20.472,21.366 23.597,24.491 CN1.8 pad.2@23.8,25.872 ; IC1.14 29.318,10.509 29.32,10.507 v1(29.32,10.501)
  Bottom Layer w0.2: v1(20.168,21.366) 19.983,21.182 18.013,21.182 17.704,20.873 17.704,19.385 18.09,18.999 18.09,16.345 18.09,13.234 19.423,11.901 21.99,11.901 23.39,10.501 v1(29.32,10.501)
PA6: CN1.9 IC1.15 pad.2@21.26,26.136 | length 28.9
  Top Layer w0.2: v1@19.7,20.793 v1(19.71,20.782) ; v1@19.7,20.851 19.7,22.931 CN1.9 21.26,26.136 ; IC1.15 29.318,11.009 29.32,11.007 v1(29.32,11.001)
  Bottom Layer w0.2: v1(19.71,20.782) 19.71,20.858 18.465,20.858 18.11,20.504 18.11,19.588 18.39,19.309 18.39,16.221 18.39,13.467 19.596,12.261 22.2,12.261 23.46,11.001 v1(29.32,11.001) ; CN1.9 pad.2@21.26,25.872
PA7: CN1.10 IC1.16 pad.2@18.72,26.136 | length 24.4
  Top Layer w0.2: pad.2@18.72,25.872 CN1.10 18.726,24.485 v1(18.726,20.326) ; IC1.16 29.331,11.509 v1(29.34,11.501)
  Bottom Layer w0.2: v1(18.726,20.326) 18.726,13.69 19.843,12.573 22.312,12.573 23.384,11.501 v1(29.34,11.501)
PA8: CN2.8 IC1.17 pad.2@23.8,-0.005 | length 17.5
  Top Layer w0.2: v1(23.724,3.556) 23.724,1.758 23.825,1.656 CN2.8 ; IC1.17 29.298,12.009 v1(29.287,12.021)
  Bottom Layer w0.2: v1(23.724,3.556) 23.698,3.556 23.495,3.759 23.495,9.042 24.003,9.55 29.71,9.55 29.89,9.731 29.89,11.516 29.385,12.021 v1(29.287,12.021)
PA9: IC1.18 SB2.2 | length 24.5
  Top Layer w0.2: 17.678,7.087 v1(18.136,6.629) ; v1(22.047,3.708) 23.114,3.708 23.546,4.14 23.927,4.14 v1@24.054,4.013 ; IC1.18 29.431,12.509 29.78,12.161 v1(29.88,12.161)
  Bottom Layer w0.2: v1(18.136,6.629) 18.136,6.604 18.466,6.274 18.466,4.699 19.202,3.962 21.361,3.962 21.615,3.708 v1(22.047,3.708) v1@22.123,3.632 ; v1(24.054,4.115) 24.054,4.369 23.952,4.47 23.952,8.769 24.384,9.201 29.978,9.201 30.277,9.5 30.277,11.764 v1(29.88,12.161)
PA10: IC1.36 R3.2 | length 15.9
  Top Layer w0.2: R3.2 8.165,17.596 8.92,16.84 10.898,16.84 11.66,16.078 16.535,16.078 17.247,16.789 19.05,16.789 19.68,16.159 IC1.36
PA13: CN1.3 IC1.39 pad.2@36.5,26.136 | length 22.9
  Top Layer w0.2: v1(21.32,14.511) 21.321,14.509 IC1.39
  Bottom Layer w0.2: v1(21.32,14.511) 21.32,14.921 21.22,15.021 21.22,18.634 23.285,20.7 25.718,20.7 25.72,20.697 26.482,20.697 26.484,20.7 27.191,20.7 27.193,20.697 28.467,20.697 29.034,21.265 34.041,21.265 34.544,21.768 34.544,22.535 CN1.3
PA14: CN1.4 IC1.41 pad.2@33.96,26.136 | length 21.9
  Top Layer w0.2: v1(21.34,13.501) 21.348,13.509 IC1.41
  Bottom Layer w0.2: v1(21.34,13.501) 21.34,13.925 20.92,14.345 20.92,18.893 23.027,21 28.345,21 28.965,21.62 31.882,21.62 32.341,22.079 32.341,22.871 CN1.4
PB0: CN4.3 IC1.28 R5.1 | length 32.4
  Top Layer w0.2: R5.1 13.487,16.815 13.624,16.678 16.272,16.678 16.485,16.891 16.485,17.755 16.789,18.059 19.533,18.059 20.269,18.796 20.269,20.345 21.239,21.316 24.867,21.316 25.146,21.036 25.146,20.14 26.194,19.093 26.194,17.697 26.543,17.348 v1(26.924,17.348) 26.594,17.348 26.551,17.305 IC1.28
  Bottom Layer w0.2: v1(26.924,17.348) 30.404,17.348 31.039,17.983 32.537,17.983 33.299,17.221 35.509,17.221 36.271,17.983 CN4.3
PB1: CN4.4 IC1.29 R6.1 | length 38.8
  Top Layer w0.2: R6.1 15.85,17.678 16.358,18.186 v1(16.358,19.456) ; v1(25.679,17.678) 26.051,17.307 IC1.29 ; v1@26.594,19.895 27.184,19.895 27.965,20.676 30.048,20.676 ; v1(27.381,23.216) 28.956,23.216 30.048,22.123 30.048,20.676 ; v1(30.81,20.371) 30.759,20.371 30.455,20.676 30.048,20.676
  Bottom Layer w0.2: v1(16.358,19.456) 16.358,19.482 15.672,20.168 15.672,20.98 17.399,22.708 19.863,22.708 20.371,23.216 v1(27.381,23.216) ; v1(25.679,17.678) 25.679,19.456 26.111,19.888 v1(26.594,19.888) ; v1(30.81,20.371) 36.474,20.371 37.541,19.304 CN4.4
PB2: CN1.7 IC1.19 pad.2@26.34,26.136 | length 19.9
  Top Layer w0.2: pad.2@26.34,25.872 CN1.7 26.34,23.089 26.695,22.733 28.524,22.733 29.312,21.946 29.312,21.234 29.057,20.98 27.762,20.98 27.076,20.295 v1(27,20.295) ; IC1.19 29.191,13.009 v1(29.2,13.001)
  Bottom Layer w0.2: v1(27,20.295) 27,19.533 26.816,19.348 26.479,19.348 26.162,19.031 26.162,16.383 27.05,15.495 27.05,14.118 28.167,13.001 v1(29.2,13.001)
PB3: CN1.5 IC1.43 pad.2@31.42,26.136 | length 21.1
  Top Layer w0.2: v1(20.51,13.331) 21.331,12.509 IC1.43
  Bottom Layer w0.2: v1(20.51,13.331) 20.51,18.965 22.844,21.3 28.22,21.3 28.871,21.951 29.799,21.951 30.15,22.301 30.15,23.221 CN1.5
PB6: CN2.6 IC1.46 pad.2@28.88,-0.005 | length 18.1
  Top Layer w0.2: v1(21.07,11.071) 21.131,11.009 IC1.46
  Bottom Layer w0.2: v1(21.07,11.071) 21.35,11.071 21.59,10.831 21.59,4.953 23.393,3.15 28.499,3.15 28.88,2.769 CN2.6 pad.2@28.88,0.25
PB7: IC1.47 SB6.2 | length 4
  Top Layer w0.2: 17.874,10.479 17.904,10.509 IC1.47
PB8: CN2.1 IC1.5 pad.2@41.58,-0.005 | length 22.8
  Top Layer w0.2: v1(24.55,8.801) IC1.5
  Bottom Layer w0.2: v1(24.55,8.801) 24.844,8.801 25.384,8.261 25.715,8.261 25.725,8.271 27.67,8.271 28.58,7.361 28.58,7.085 29.848,5.817 35.636,5.817 38.125,3.327 40.996,3.327 41.58,2.743 CN2.1 pad.2@41.58,0.25
PB9: CN2.2 IC1.6 pad.2@39.04,-0.005 | length 18.5
  Top Layer w0.2: v1(24.6,8.291) 24.73,8.291 25.051,8.611 IC1.6
  Bottom Layer w0.2: v1(24.6,8.291) 24.93,7.961 27.25,7.961 30.003,5.207 35.483,5.207 CN2.2@39.05,1.641
USB_N: IC1.37 IC2.1 | length 13.2
  Top Layer w0.2: IC2.1 11.27,13.621 11.48,13.831 11.48,14.421 11.9,14.841 13.498,14.841 13.973,15.316 16.84,15.316 17.577,16.053 18.847,16.053 19.391,15.509 IC1.37
USB_P: IC1.38 IC2.3 | length 13.6
  Top Layer w0.2: IC2.3 v1(12.22,15.521) ; v1(12.243,14.298) 13.597,14.298 14.112,14.813 16.979,14.813 17.762,15.596 18.644,15.596 19.23,15.009 IC1.38
  Bottom Layer w0.2: v1@12.22,14.311 v1(12.22,15.521)
pads on no net: CN3.5 IC1.30 IC1.42 IC1.44 IC1.45 SW2.0 SW2.1

## Polygon pours and split planes (outlines as drawn)
GND on Top Layer "GND_L01_P012" (solid, remove dead copper, pour order 12): 0.102,19.38 cw(c2.438,19.38) 2.438,21.717 2.464,21.717 14.681,21.717 ccw(c14.681,21.768) 14.732,21.768 ccw(c14.732,22.784) 15.748,22.784 15.748,25.07 cw(c15.773,25.07) 15.773,25.095 15.773,25.121 cw(c16.789,25.121) 16.789,26.137 43.688,26.137 43.688,0.025 cw(c43.663,0.025) 43.663,0 16.789,0 cw(c16.789,1.016) 15.773,1.016 15.773,3.327 15.773,3.378 ccw(c14.783,3.378) 14.783,4.369 2.464,4.369 2.438,4.369 cw(c2.438,6.706) 0.102,6.706 0.102,19.355 cw(c0.127,19.355) 0.127,19.38
ANT on Top Layer "L2-No Net" (solid, pour order 0): 43.525,13.764 45.15,13.764 45.15,16.239 45.875,16.239 45.875,7.314 47.525,7.314 47.525,16.239 48.25,16.239 48.25,7.289 49.925,7.289 49.925,14.264 49.475,14.264 49.475,9.864 49.475,7.764 48.725,7.764 48.725,16.689 48.675,16.689 47.05,16.689 47.05,16.664 47.05,7.789 46.675,7.789 46.3,7.789 46.3,7.864 46.3,16.689 46.275,16.689 44.65,16.689 44.65,16.664 44.65,14.164 43.5,14.164 43.5,13.764
GND on Bottom Layer "GND_L02_P014" (solid, remove dead copper, pour order 14): 0.117,19.439 cw(c2.454,19.439) 2.454,21.776 2.479,21.776 14.697,21.776 ccw(c14.697,21.827) 14.747,21.827 ccw(c14.747,22.843) 15.763,22.843 15.763,25.129 cw(c15.789,25.129) 15.789,25.154 15.789,25.18 cw(c16.805,25.18) 16.805,26.196 43.703,26.196 43.703,0.085 cw(c43.678,0.085) 43.678,0.059 16.805,0.059 cw(c16.805,1.075) 15.789,1.075 15.789,3.387 15.789,3.437 ccw(c14.798,3.437) 14.798,4.428 2.479,4.428 2.454,4.428 cw(c2.454,6.765) 0.117,6.765 0.117,19.414 cw(c0.142,19.414) 0.142,19.439

## Keep-outs
Keep-Out Layer:
  lines w0.1: 0,6.716 0,19.377 cw(c2.356,19.377) 2.356,21.733 ; -0.001,6.716 ccw(c2.355,6.716) 2.355,4.361 ; 2.345,4.371 14.66,4.371 ; 2.356,21.743 3.87,21.743 ; 3.87,21.751 14.63,21.751 ; 14.63,21.751 ccw(c14.63,22.771) 15.65,22.771 ; 14.66,4.361 cw(c14.66,3.341) 15.68,3.341 ; 15.65,25.101 cw(c16.67,25.101) 16.67,26.121 43.568,26.122 ; 15.65,25.202 15.65,22.771 ; 15.67,1.01 ccw(c16.69,1.01) 16.69,-0.01 ; 15.675,1.01 15.675,3.341 ; 16.69,0 43.54,0 ; 43.528,26.118 cw(c43.528,19.118) 50.528,19.118 ; 43.53,0.001 ccw(c43.53,7.001) 50.53,7.001 50.53,19.178 ; 15.65,22.77 ccw(c15.65,22.771) 15.65,22.771

## Silkscreen, mask and mechanical layers (free items; w line width, h text height)
Top Overlay:
  rectangle: 40.956,21.45 42.516,22.05
  lines w0.1: 16.51,6.02 16.513,5.232 ; 16.535,3.124 16.537,2.845 ; 16.547,8.407 16.547,24.232 ; 27.63,23.081 27.65,23.061 ; 27.635,25.888 27.66,25.863 27.66,22.081 42.977,22.081 42.977,23.094 ; 42.642,1.686 43.632,2.29 ; 42.642,1.711 43.632,1.185 ; 42.769,1.749 42.87,1.597 42.819,1.8 ; 42.819,1.775 42.896,1.8 ; 42.819,24.601 42.921,24.448 42.87,24.652 42.946,24.677 42.921,24.474 42.946,24.448 42.972,24.652 43.023,24.702 42.972,24.423 43.023,24.398 43.048,24.728 43.099,24.728 43.099,24.448 43.124,24.423 43.15,24.779 43.226,24.829 43.175,24.372 43.226,24.347 43.277,24.855 43.327,24.88 43.277,24.296 43.353,24.245 43.378,24.956 43.454,24.982 43.429,24.194 43.505,24.169 43.531,24.855 43.454,24.956 43.581,25.007 43.454,24.22 43.607,24.169 43.632,25.033 43.556,24.22 43.683,24.036 ; 42.896,1.826 42.87,1.622 42.896,1.597 42.921,1.8 ; 42.921,1.775 42.972,1.826 ; 42.972,1.851 42.921,1.572 42.972,1.546 42.997,1.876 ; 42.997,1.851 43.048,1.851 ; 43.048,1.876 43.048,1.597 43.073,1.572 43.099,1.927 ; 43.099,1.902 43.175,1.953 ; 43.175,1.978 43.124,1.521 43.175,1.495 43.226,2.003 ; 43.226,1.978 43.277,2.003 ; 43.277,2.029 43.226,1.445 43.302,1.394 43.327,2.105 ; 43.327,2.156 43.404,2.181 ; 43.404,2.08 43.48,1.978 ; 43.404,2.13 43.378,1.343 43.454,1.318 43.48,2.003 ; 43.404,2.156 43.531,2.207 ; 43.5,5.641 43.5,23.311 ; 43.531,2.156 43.404,1.368 43.556,1.318 43.581,2.181 43.505,1.368 43.632,1.185 ; 43.632,2.315 43.632,1.185 ; 43.683,24.036 43.683,25.166 42.692,24.563 43.683,24.036
  lines w0.35: 18.35,4.78 35.35,4.78 35.35,21.78 18.35,21.78 18.35,4.78
  text "PB2" at 25.883,22.428 h0.51
  text "NRST" at 38.202,22.301 h0.62
  text "PB3" at 30.709,22.276 h0.62
  text "PA14" at 32.969,22.276 h0.62
  text "PA13" at 35.611,22.276 h0.62
  text "GND" at 40.97,22.276 h0.62
  text "3V3" at 28.092,22.25 h0.62
  text "PA6" at 20.396,22.174 h0.62
  text "PA5" at 23.165,22.149 h0.62
  text "PA7" at 17.628,22.123 h0.62
  text "DEBUG" at 37.109,21.184 h0.75
  text "MB1293C" at 36.424,19.456 h1.6
  text "1" at 14.3,5.436 h2
  text "0" at 5.588,5.385 h2
  text "BOOT0" at 15.85,4.47 h0.75 r90
  text "PB6" at 28.829,3.302 h0.62
  text "PA3" at 30.683,3.302 h0.62
  text "PA9/PB7" at 24.638,3.277 h0.62
  text "PA2" at 33.325,3.282 h0.62
  text "PA0" at 35.865,3.256 h0.62
  text "PB9" at 38.405,3.256 h0.62
  text "PB8" at 40.919,3.256 h0.62
  text "PA1" at 18.11,3.226 h0.62
  text "PA8" at 22.555,3.226 h0.62
  text "GND" at 20.193,3.2 h0.62
Bottom Overlay:
  text "MB1293C" at 42.164,21.209 h2
  text "AT3" at 37.73,17.183 h0.51 r90
  text "AT0" at 33.92,17.157 h0.51 r90
  text "AT1" at 35.19,17.157 h0.51 r90
  text "Analog Test" at 41.885,17.145 h0.6
  text "AT2" at 36.435,17.132 h0.51 r90
  text "(Reserved)" at 41.758,12.573 h0.6
  text "USB_USER" at 0.723,9.741 h1 r270
Mechanical 1:
  lines w0.05: -18.4,19.211 -14.9,19.211 -14.9,22.181 ; -17.08,7.241 -17.08,7.221 -14.9,7.221 -14.9,3.661
Mechanical Edge:
  lines w0.1: 0,6.716 0,19.377 cw(c2.356,19.377) 2.356,21.733 ; -0.001,6.716 ccw(c2.355,6.716) 2.355,4.361 ; 2.345,4.371 14.66,4.371 ; 2.356,21.743 3.87,21.743 ; 3.87,21.751 14.63,21.751 ; 14.63,21.751 ccw(c14.63,22.771) 15.65,22.771 ; 14.66,4.361 cw(c14.66,3.341) 15.68,3.341 ; 15.67,1.01 ccw(c16.69,1.01) 16.69,-0.01 ; 15.675,1.01 15.675,3.341 ; 16.69,0 43.54,0 ; 43.528,26.118 cw(c43.528,19.118) 50.528,19.118 ; 43.53,0.001 ccw(c43.53,7.001) 50.53,7.001 ; 43.568,26.122 16.67,26.122 ccw(c16.67,25.101) 15.65,25.101 15.65,22.771 ; 50.53,6.711 50.53,19.178 ; 15.65,22.77 ccw(c15.65,22.771) 15.65,22.771
Mechanical:
  lines w0.1: -10.592,0 16.942,0 ; -10.541,4.371 2.388,4.371 ; -10.262,21.751 14.605,21.751 ; 0,-1.265 0,7.066 ; 0,20.128 0,42 ; 15.65,24.968 15.65,38.811 ; 16.561,-2.687 16.561,1.758 ; 18.72,24.491 18.72,32.182 ; 21.26,24.491 21.26,32.182 ; 41.58,1.631 61.189,1.631 ; 41.58,32.868 41.58,24.491 54.839,24.491 ; 42.037,0 62.535,0 ; 43.235,26.122 62.89,26.122 ; 43.541,-2.207 43.541,2.238 ; 50.53,-3.983 50.53,42
  lines w0.254: -8.508,5.895 -8,4.371 ; -8.508,20.227 -8,21.751 ; -8.254,4.371 -7.746,4.371 ; -8.254,21.751 -7.746,21.751 ; -8,7.83 -8,4.371 ; -8,18.292 -8,21.751 ; -7.492,5.895 -8,4.371 ; -7.492,20.227 -8,21.751 ; -6.008,-1.524 -5.5,0 ; -6.008,5.895 -5.5,4.371 ; -5.754,0 -5.246,0 ; -5.754,4.371 -5.246,4.371 ; -5.5,-2.54 -5.5,0 ; -5.5,6.911 -5.5,4.371 ; -4.992,-1.524 -5.5,0 ; -4.992,5.895 -5.5,4.371 ; 0,39.746 0,40.254 ; 1.524,39.492 0,40 ; 1.524,40.508 0,40 ; 15.65,34.746 15.65,35.254 ; 16.18,31 18.72,31 ; 16.531,-2.434 16.531,-1.926 ; 17.174,34.492 15.65,35 ; 17.174,35.508 15.65,35 ; 17.196,30.492 18.72,31 ; 17.196,31.508 18.72,31 ; 18.055,-2.688 16.531,-2.18 ; 18.055,-1.672 16.531,-2.18 ; 18.72,30.746 18.72,31.254 ; 19.907,40 0,40 ; 21.26,30.746 21.26,31.254 ; 22.784,30.492 21.26,31 ; 22.784,31.508 21.26,31 ; 23.8,31 21.26,31 ; 23.901,-2.18 16.531,-2.18 ; 27.732,35 15.65,35 ; 30.623,40 50.53,40 ; 36.14,-2.18 43.51,-2.18 ; 38.448,35 50.53,35 ; 39.04,31 41.58,31 ; 40.056,30.492 41.58,31 ; 40.056,31.508 41.58,31 ; 41.58,30.746 41.58,31.254 ; 41.986,-2.688 43.51,-2.18 ; 41.986,-1.672 43.51,-2.18 ; 43.51,-2.434 43.51,-1.926 ; 49.006,34.492 50.53,35 ; 49.006,35.508 50.53,35 ; 49.006,39.492 50.53,40 ; 49.006,40.508 50.53,40 ; 50.53,30.746 50.53,31.254 ; 50.53,34.746 50.53,35.254 ; 50.53,39.746 50.53,40.254 ; 52.054,30.492 50.53,31 ; 52.054,31.508 50.53,31 ; 52.492,3.155 53,1.631 ; 52.492,22.967 53,24.491 ; 52.746,1.631 53.254,1.631 ; 52.746,24.491 53.254,24.491 ; 53,7.703 53,1.631 ; 53,18.419 53,24.491 ; 53.07,31 50.53,31 ; 53.508,3.155 53,1.631 ; 53.508,22.967 53,24.491 ; 56.992,1.524 57.5,0 ; 56.992,24.598 57.5,26.122 ; 57.246,0 57.754,0 ; 57.246,26.122 57.754,26.122 ; 57.5,7.069 57.5,0 ; 57.5,19.054 57.5,26.122 ; 58.008,1.524 57.5,0 ; 58.008,24.598 57.5,26.122 ; 59.492,-1.524 60,0 ; 59.492,3.155 60,1.631 ; 59.746,0 60.254,0 ; 59.746,1.631 60.254,1.631 ; 60,-2.54 60,0 ; 60,4.171 60,1.631 ; 60.508,-1.524 60,0 ; 60.508,3.155 60,1.631
  text "50.53mm" at 20.161,39.086 h1.52
  text "34.88mm" at 27.986,34.086 h1.52
  text "2.54mm" at 15.648,27.343 h1.52
  text "8.95mm" at 41.713,27.343 h1.52
  text "17.38mm" at -7.086,8.084 h1.52 r90
  text "22.86mm" at 53.914,7.957 h1.52 r90
  text "26.122mm" at 58.414,7.323 h1.52 r90
  text "4.371mm" at -1.843,-2.791 h1.52 r90
  text "26.979mm" at 24.155,-3.094 h1.52
  text "1.631mm" at 63.657,-4.034 h1.52 r90
  text "(Module Part)" at 21.59,-5.156 h1.54
Top designator:
  lines w0.1: 17.958,6.248 17.958,6.454 18.848,7.344 ; 18.11,5.588 18.171,5.588 18.868,6.284 ; 18.11,8.992 18.672,8.992 18.858,9.177

## Text inside footprints (layer, text, board x,y; h text height)
Label_2: Bottom Overlay "RoHS" at 27.893,13.254 h1.6; Bottom Overlay "COMPLIANT" at 28.293,11.854 h0.8; Bottom Overlay "2002/95/EC" at 28.793,10.554 h0.8
Label_4: Bottom Overlay "STM32" at 11.905,10.466 h1.5